# Altium PCB QuadCape_4L_PCB.PcbDoc
Units mil, origin at the board's own origin, x right, y up, seen from the top; angles counter-clockwise.
Board outline 3645 x 4300 mil, 4 copper layers (Top Layer, PowerPlane, GroundPlane, Bottom Layer), stack 35.5 mil thick; 56 components, 85 nets, 303 pads, 40 vias.
Unrouted connection lines stored in the file: 28.
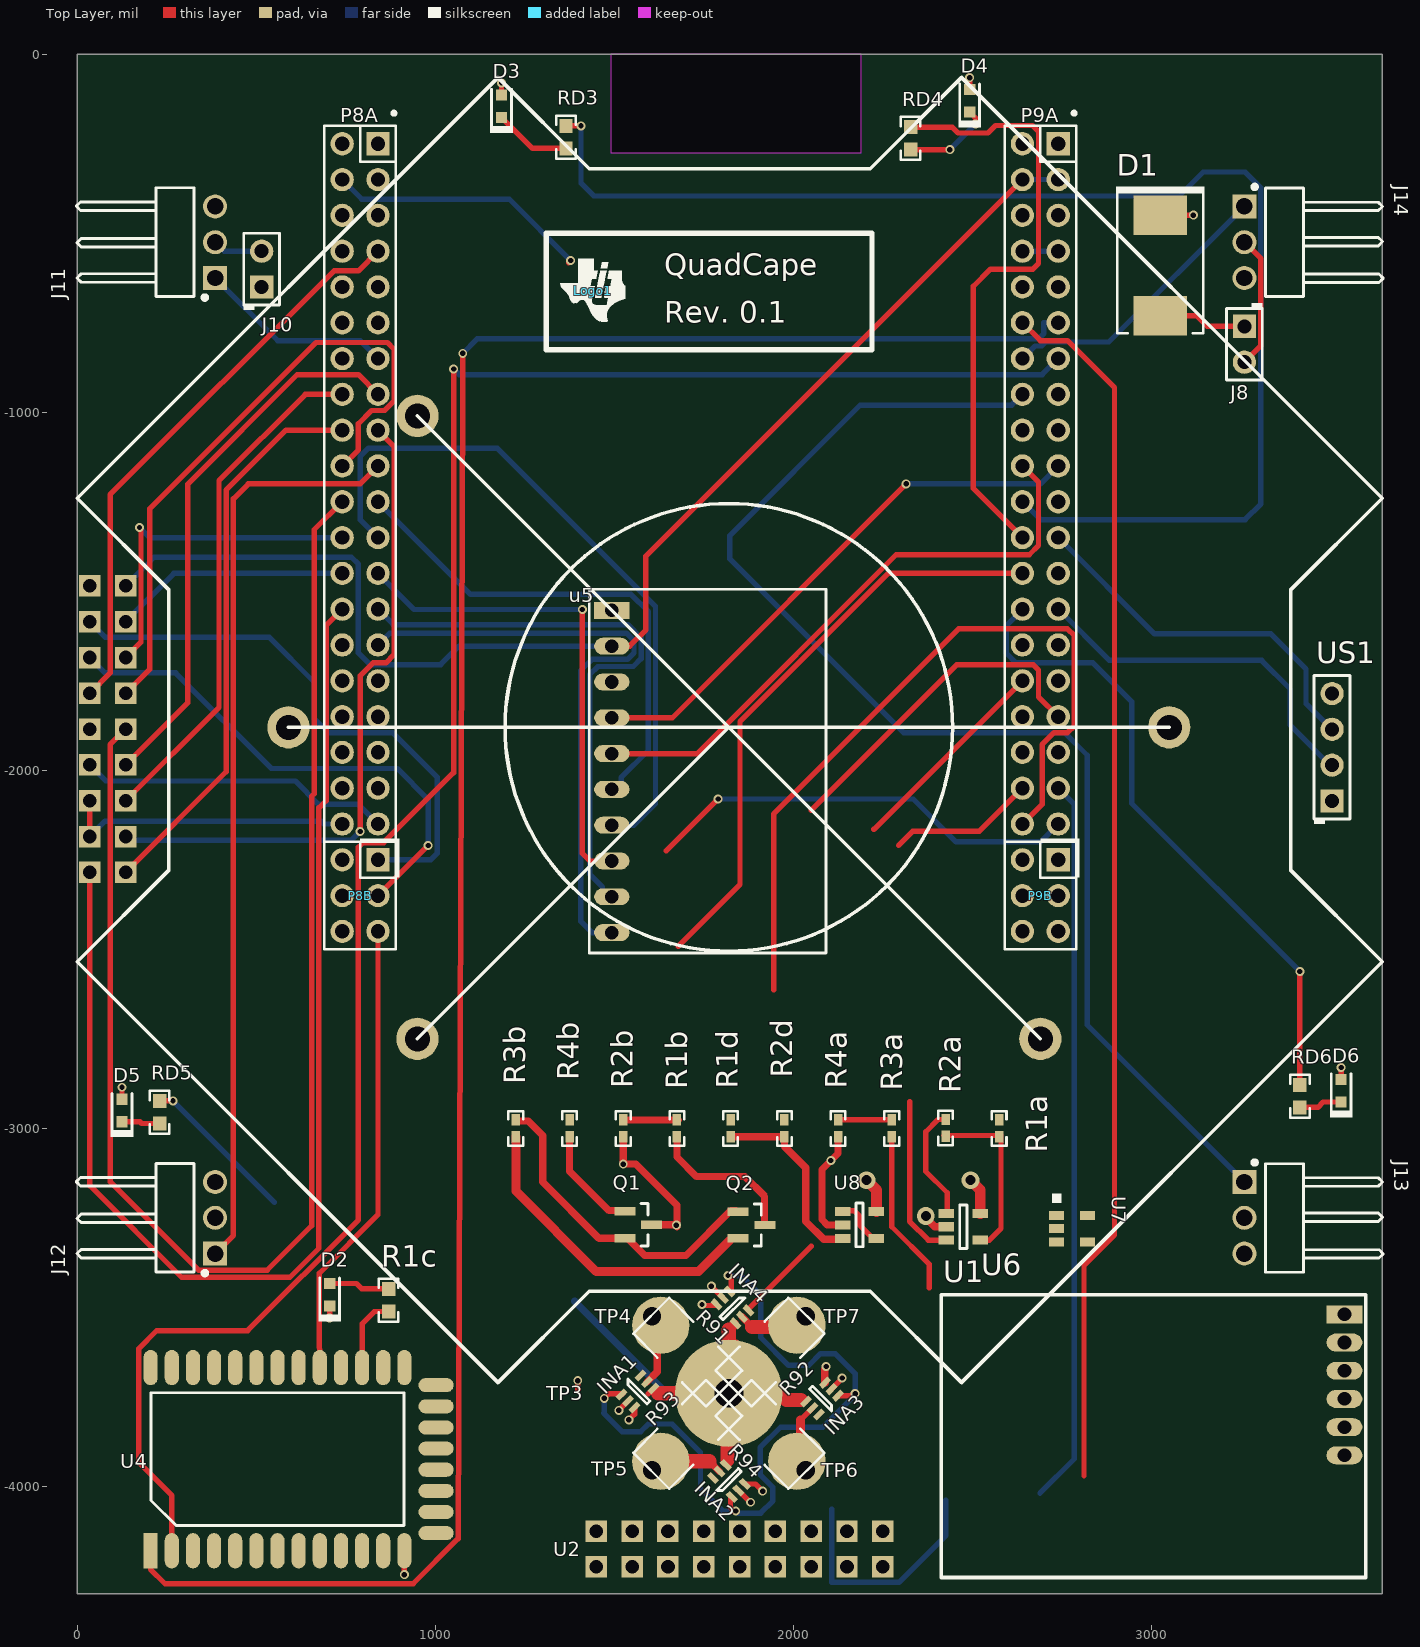
[diagram p0: Top Layer view]
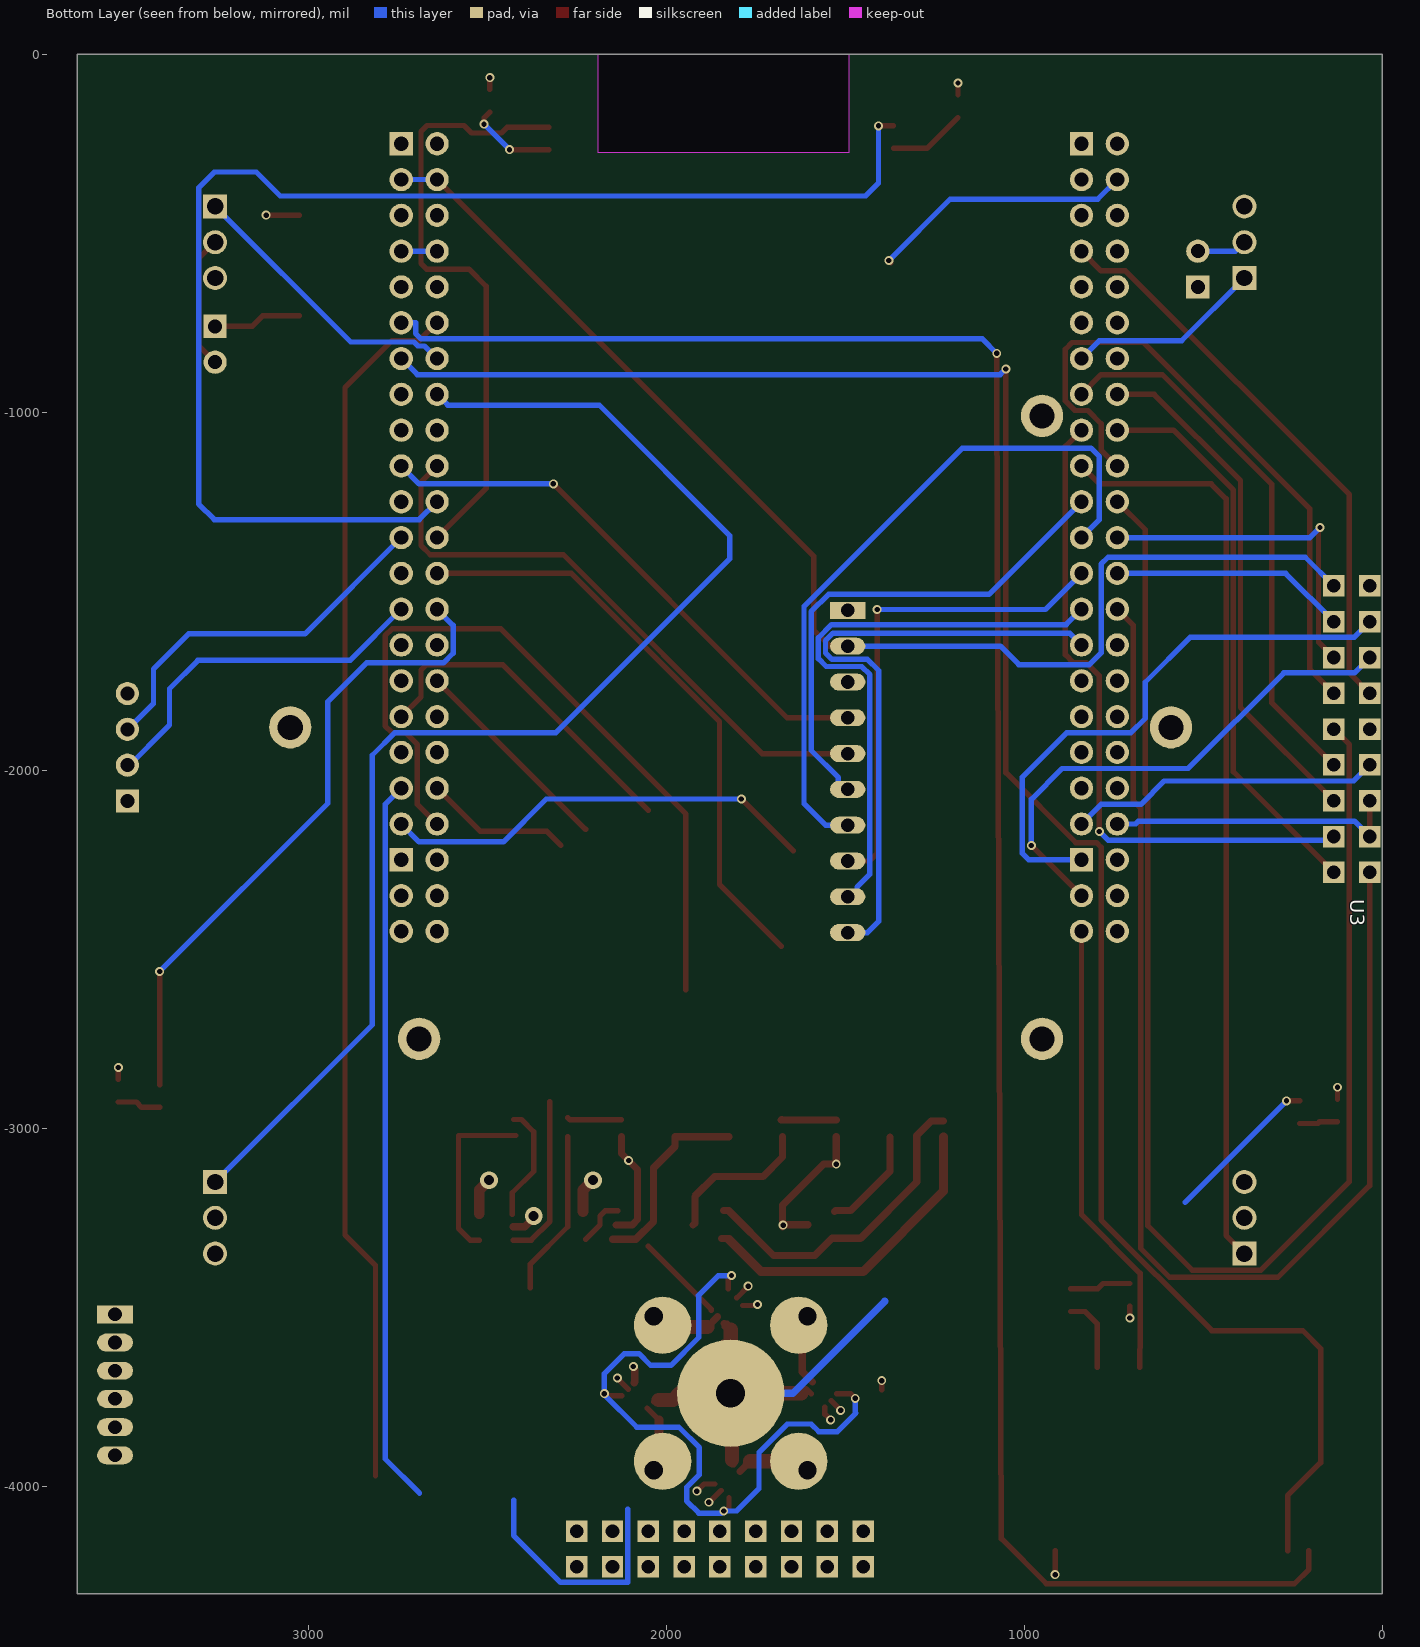
[diagram p1: Bottom Layer view, seen from below]
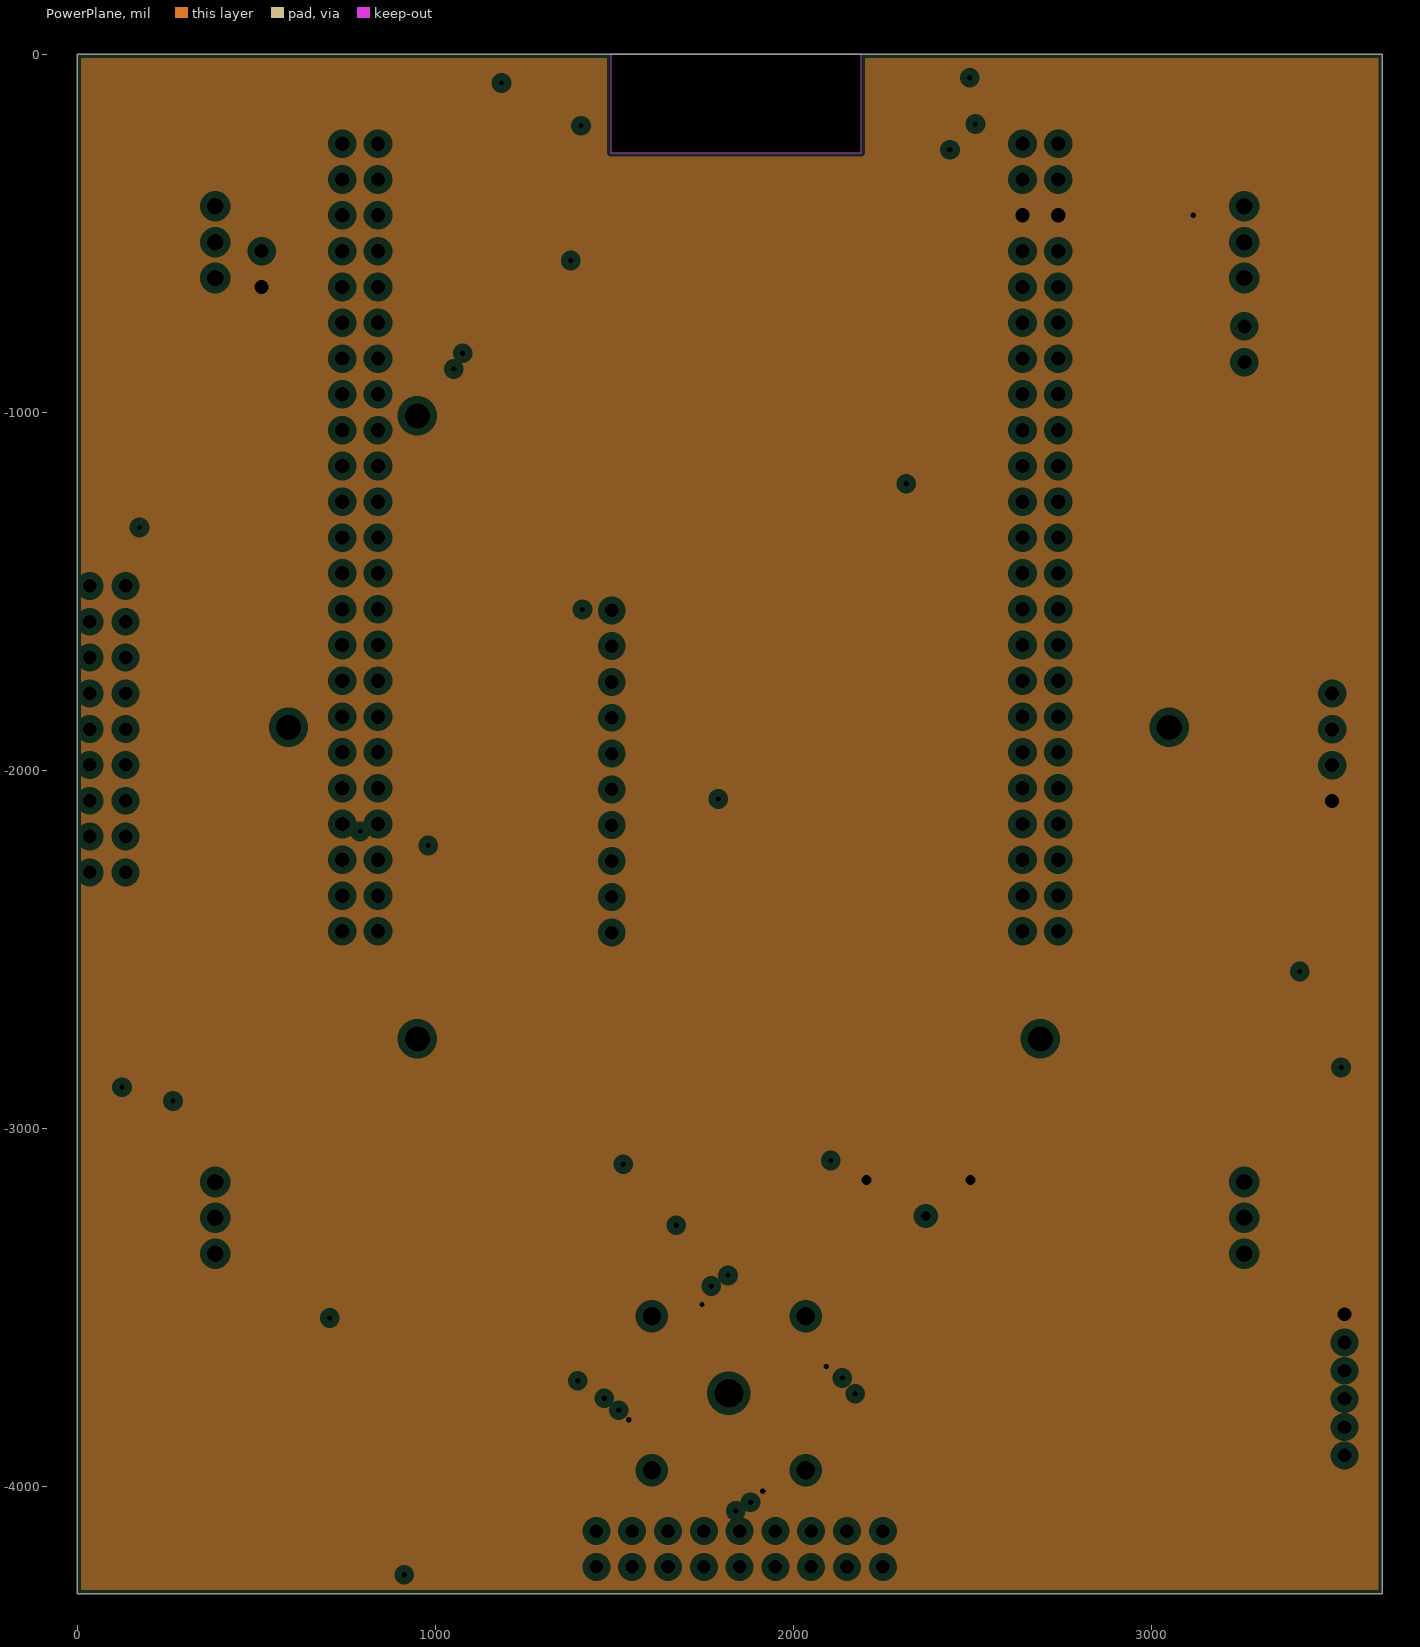
[diagram p2: PowerPlane, clearances drawn from the general rule]
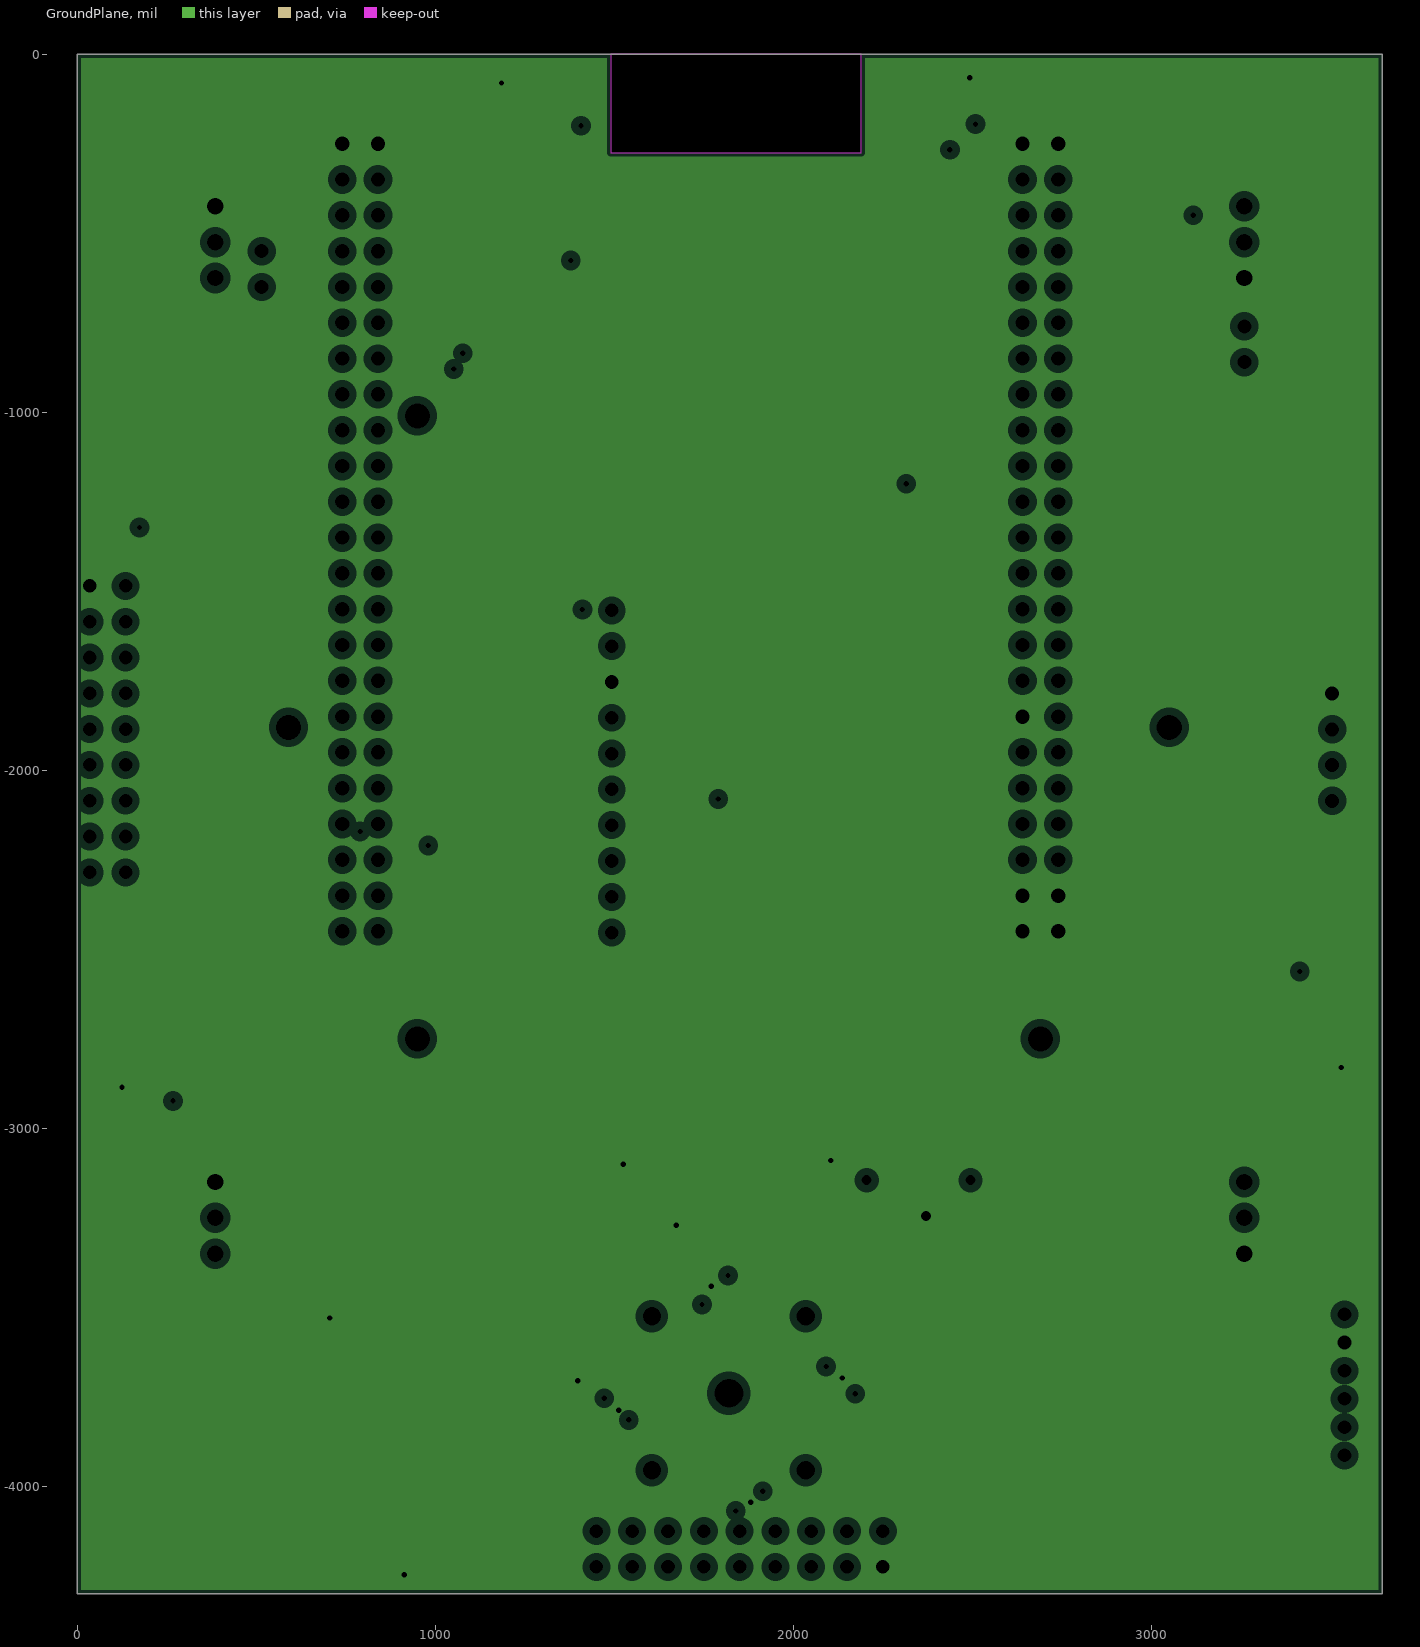
[diagram p3: GroundPlane, clearances drawn from the general rule]

## Layer stack, top to bottom
Top Layer: signal copper 1.4
Dielectric: core 10, FR-4, Dk 4.8
PowerPlane: plane copper 1.35, net VDD_5V
Dielectric: prepreg 10, FR-4, Dk 4.8
GroundPlane: plane copper 1.35, net GND
Dielectric: core 10, FR-4, Dk 4.8
Bottom Layer: signal copper 1.4

## Board outline
0,-4300 0,0 3645,0 3645,-4300
cut-out: 1490,0 1490,-275 2190,-275 2190,0

## Design rules (kind name [scope] priority, off if disabled: settings)
AssemblyTestPointUsage [All] p1 off:
AssemblyTestpoint [All] p1 off: testpointundercomponent=TRUE minsize=40 maxsize=100 preferedsize=60 minholesize=0 maxholesize=40 preferedholesize=32 testpointgrid=1 usegrid=TRUE gridtolerance=0.01 allowsidetop=TRUE allowsidebottom=TRUE
Clearance [All] p1: gap=5
ComponentClearance [All] p1 off: gap=10 collisioncheckmode=3 verticalgap=10 showdistances=FALSE
DiffPairsRouting [All] p1 off: maxlimit=10 minlimit=10 mostfreqgap=10 maxuncoupledlength=500
FabricationTestPointUsage TestPointUsage [All] p1 off: valid=0 allowmultiple=FALSE
FabricationTestpoint Testpoint [All] p1 off: side=3 testpointundercomponent=TRUE minsize=40 maxsize=100 preferedsize=60 minholesize=0 maxholesize=40 preferedholesize=32 testpointgrid=1 allowsidetop=TRUE allowsidebottom=TRUE usegrid=TRUE gridtolerance=0.01
FanoutControl Fanout_BGA [IsBGA] p1 off: bgadir=Out bgaviamode=Centered fanoutstyle=Auto fanoutdirection=Alternating viagrid=1 // Fanout_BGA (Default Rule)
FanoutControl Fanout_LCC [IsLCC] p2 off: bgadir=Out bgaviamode=Centered fanoutstyle=Auto fanoutdirection=Alternating viagrid=1 // Fanout_LCC (Default Rule)
FanoutControl Fanout_SOIC [IsSOIC] p3 off: bgadir=Out bgaviamode=Centered fanoutstyle=Auto fanoutdirection=Alternating viagrid=1 // Fanout_SOIC (Default Rule)
FanoutControl Fanout_Small [(CompPinCount < 5)] p4 off: bgadir=Out bgaviamode=Centered fanoutstyle=Auto fanoutdirection=OutThenIn viagrid=1 // Fanout_Small (Default Rule)
FanoutControl Fanout_Default [All] p5 off: bgadir=Out bgaviamode=Centered fanoutstyle=Auto fanoutdirection=Alternating viagrid=1 // Fanout_Default (Default Rule)
Height [All] p1 off: minheight=0 maxheight=1000 prefheight=500
HoleSize [All] p1: absolutevalues=TRUE maxlimit=400 minlimit=15 maxpercent=80.000 minpercent=20.000
HoleToHoleClearance [All] p1: gap=8 allowstackedmicrovias=TRUE
LayerPairs [All] p1 off: enforce=FALSE
MinimumSolderMaskSliver [All] p1: minsoldermaskwidth=4
PlaneClearance [All] p1: clearance=20
PlaneConnect [All] p1: planeconnectstyle=Relief reliefexpansion=20 reliefentries=4 reliefconductorwidth=10 reliefairgap=10
PolygonConnect [All] p1: connectstyle=Relief reliefconductorwidth=25 reliefentries=4 polygonreliefangle="90 Angle" airgapwidth=10
RoutingVias [All] p1: holewidth=15 width=25 viastyle="Through Hole" minholewidth=15 minwidth=25 maxholewidth=400 maxwidth=500
SilkToSilkClearance [All] p1: silktosilkclearance=5
SilkscreenOverComponentPads [All] p1: minsilkscreentomaskgap=5
SolderMaskExpansion [All] p1: expansion=2
Width [All] p1: maxlimit=100 minlimit=10 preferedwidth=15 minimp=50.000000 maximp=50.000000 favimp=50.000000
8 further rules are at their usual default settings.

## Classes and differential pairs
component class Header: J1 J2 J3 J4 J5 J6 P1 P2 P3 P4 US1

## Components (designator, comment, footprint, x,y, rotation, side; value= is the part's Value field where it differs from the comment)
D1 "CDBC520-G" SMC 3025,-590 r270 top
D2 "150060YS75000" WL-SMCW_YELLOW 705,-3465 r90 top
D3 "150060YS75000" WL-SMCW_YELLOW 1185,-145 r90 top
D4 "150060YS75000" WL-SMCW_YELLOW 2492.72,-130 r90 top
D5 "150060YS75000" WL-SMCW_YELLOW 125,-2950 r90 top
D6 "150060YS75000" WL-SMCW_YELLOW 3530,-2895 r90 top
INA1 "INA213AIDCK" DCK0006A_N 1565,-3735 r45 top
INA2 "INA213AIDCK" DCK0006A_N 1820,-3985 r135 top
INA3 "INA213AIDCK" DCK0006A_N 2080,-3755 r225 top
INA4 "INA213AIDCK" DCK0006A_N 1830,-3500 r315 top
J8 "5-146278-2" TE_5-146278-2 3260,-810 r270 top
J10 "5-146278-2" TE_5-146278-2 515,-600 r90 top
J11 "PEC03SBAN" Sullins_PEC03SBAN 385,-525 r90 top
J12 "PEC03SBAN" Sullins_PEC03SBAN 385,-3250 r90 top
J13 "PEC03SBAN" Sullins_PEC03SBAN 3260,-3250 r270 top
J14 "PEC03SBAN" Sullins_PEC03SBAN 3260,-525 r270 top
Logo1 "Texas Instruments" TI_Symbol_Overlay_Small 1440,-660 r0 top
P8A "Comment" TSW-120-07-G-D 790,-1200 r270 top locked
P8B "Comment" SULLINS_PEC03DAAN 790,-2350 r270 top locked
P9A "Comment" TSW-120-07-G-D 2690,-1200 r270 top locked
P9B "Comment" SULLINS_PEC03DAAN 2690,-2350 r270 top locked
Q1 "BC817-16LT1G" SOT-23 1566.93,-3269.48 r0 top
Q2 "BC817-16LT1G" SOT-23 1883.17,-3270 r0 top
R1a "CRCW040226K1FKED" 0402 2575,-3000 r270 top
R1b "CRCW040243K2FKED" 0402 1675,-3000 r270 top
R1c "RT0603DRE07459RL" 0603 870,-3480 r90 top
R1d "CRCW040210K0JNED" 0402 1825,-3000 r270 top
R2a "CRCW040212K4FKED" 0402 2425.46,-2998.86 r90 top
R2b "CRCW040224K3FKED" 0402 1525,-3000 r90 top
R2d "CRCW040210K0JNED" 0402 1975,-3000 r270 top
R3a "CRCW040251K0JNED" 0402 2275,-3000 r90 top
R3b "CRCW040243K2FKED" 0402 1225,-3000 r270 top
R4a "CRCW0402100KFKED" 0402 2125,-3000 r90 top
R4b "CRCW040243K2FKED" 0402 1375,-3000 r270 top
R91 "CSNL2010FT1L00" 2010M 1705,-3625 r135 top
R92 "CSNL2010FT1L00" 2010M 1935,-3625 r225 top
R93 "CSNL2010FT1L00" 2010M 1705,-3855 r225 top
R94 "CSNL2010FT1L00" 2010M 1935,-3855 r135 top
RD3 "RT0603DRE07459RL" 0603 1365,-231.5 r90 top
RD4 "RT0603DRE07459RL" 0603 2327.72,-235 r90 top
RD5 "RT0603DRE07459RL" 0603 230,-2955 r90 top
RD6 "RT0603DRE07459RL" 0603 3415,-2910 r90 top
TP3 "TESTPOINT" TESTPOINT#1 1820,-3740 r0 top
TP4 "TESTPOINT" TESTPOINT#2 1605,-3525 r0 top
TP5 "TESTPOINT" TESTPOINT#3 1605,-3955 r0 top
TP6 "TESTPOINT" TESTPOINT#4 2035,-3955 r0 top
TP7 "TESTPOINT" TESTPOINT#5 2035,-3525 r0 top
U1 "SKM53" SKM53 3598.55,-3464.53 r180 top
U2 "OV7670" HEADER_2X9 2250,-4125 r180 top
U3 "OV7670" HEADER_2X9 135,-1485 r270 bottom
U4 "HC-06" HC-06 205,-4180 r90 top
u5 "IMU_10DOF" IMU_10DOF 1430,-2510 r0 top (schematic designator U5)
U6 "OPA735AIDBVR" DBV0005A_N 2475,-3275 r0 top
U7 "SN74LVC1G04DBV" SOT23-5P 2780,-3280 r0 top
U8 "OPA735AIDBVR" DBV0005A_N 2185,-3270 r0 top
US1 "5-146278-4" TE_5-146278-4 3504.81,-1935.57 r90 top

## Footprints (in the part's own frame and the unit in brackets; to place one, negate y for a bottom-side part, rotate by r counter-clockwise, add the part's x,y. Pads: shape width x height; smd on the part's side, far side on the other; paste and mask are expansions set on the pad)
0402 [mm] "0402 from SM-752 data"
  rect 0.8x0.6 smd: 1(-0.6,0) 2(0.6,0)
  silkscreen extent -1.22,-0.52 1.22,0.52, body extent -0.55,-0.3 0.55,0.3, height 0.6
0603 [mm] "0603 from SM-752 data"
  rect 1x0.95 smd: 1(-0.8,0) 2(0.8,0)
  silkscreen extent -1.52,-0.69 1.52,0.69, body extent -0.87,-0.47 0.87,0.47, height 0.85
2010M [mm]
  rect 1.6x2.7 smd: 1(-2.4,0) 2(2.4,0)
  silkscreen extent -3.65,-1.8 3.65,1.8, body extent -2.73,-1.45 2.73,1.45, height 1.66
DBV0005A_N [mm] "SOT23, 5-Leads, Body 2.9x1.6mm, Pitch 0.95mm, Lead Span 2.8mm, IPC Medium Density"
  rect 1.1x0.65 smd: 1(-1.2,0.95) 2(-1.2,0) 3(-1.2,-0.95) 4(1.2,-0.95) 5(1.2,0.95)
  silkscreen extent -0.25,-1.55 0.25,1.55, body extent -1.42,-1.46 1.42,1.46, height 1.08
DCK0006A_N [mm] "SOT23, 6-Leads, Body 2x1.3mm, Pitch 0.65mm, Lead Span 2.1mm, IPC Medium Density"
  rect 0.85x0.4 smd: 1(-0.95,0.65) 2(-0.95,0) 3(-0.95,-0.65) 4(0.95,-0.65) 5(0.95,0) 6(0.95,0.65)
  silkscreen extent -0.15,-1.1 0.15,1.1, body extent -1.14,-1 1.14,1, height 0.94
HC-06 [mm]
  rect 2.5x1 smd: 1(0,0)
  oval 2.5x1 smd: 2(0,-1.5) 3(0,-3) 4(0,-4.5) 5(0,-6) 6(0,-7.5) 7(0,-9) 8(0,-10.5) 9(0,-12) 10(0,-13.5) 11(0,-15) 12(0,-16.5) 13(0,-18) 22(13,-18) 23(13,-16.5) 24(13,-15) 25(13,-13.5) 26(13,-12) 27(13,-10.5) 28(13,-9) 29(13,-7.5) 30(13,-6) 31(13,-4.5) 32(13,-3) 33(13,-1.5) 34(13,0)
  oval 1x2.5 smd: 14(1.25,-20.25) 15(2.75,-20.25) 16(4.25,-20.25) 17(5.75,-20.25) 18(7.25,-20.25) 19(8.75,-20.25) 20(10.25,-20.25) 21(11.75,-20.25)
  silkscreen extent 1.79,-17.97 11.22,-0.04
HEADER_2X9 [mil]
  rect 60x60 hole 38: 1(0,0) 2(0,100) 3(100,0) 4(100,100) 5(200,0) 6(200,100) 7(300,0) 8(300,100) 9(400,0) 10(400,100) 11(500,0) 12(500,100) 13(600,0) 14(600,100) 15(700,0) 16(700,100) 17(800,0) 18(800,100)
IMU_10DOF [mm]
  rect 2.5x1.2 hole 0.966: 1(1.6,24.3)
  oval 2.5x1.2 hole 0.966: 2(1.6,21.76) 3(1.6,19.22) 4(1.6,16.68) 5(1.6,14.14) 6(1.6,11.6) 7(1.6,9.06) 8(1.6,6.52) 9(1.6,3.98) 10(1.6,1.44)
  silkscreen extent 0,0 16.8,25.8
SKM53 [mm] "GPS Module"
  rect 2.54x1.27 hole 0.966: 1(1.5,1.4)
  oval 2.54x1.27 hole 0.966: 2(1.5,3.4) 3(1.5,5.4) 4(1.5,7.4) 5(1.5,9.4) 6(1.5,11.4)
  silkscreen extent 0,0 30.1,20.07
SMC [mil] "Molded Diode, 2-Leads, Body 6.9x5.8mm, IPC Medium Density, based on OnSemi component dimensions and land patterns"
  rect 110x150 smd: 1(-140.49,0) 2(140.49,0)
  silkscreen extent -221,-124 189,123, body extent -156,-116 156,116, height 91
SOT23-5P [mil]
  rect 42x25 smd: 1(-45,37) 2(-45,0) 3(-45,-37) 4(42,-37) 5(42,37)
  silkscreen extent -57,73 -32,98
SOT-23 [mm] "SOT23, 3-Leads, Body 2.9x1.3mm, Pitch 0.95mm, Lead Span 2.5mm, IPC Medium Density"
  rect 1.5x0.6 smd: 1(-0.95,0.95) 2(-0.95,-0.95) 3(0.95,0)
  silkscreen extent 0.2,-1.5 0.7,1.5, body extent -1.16,-1.45 1.21,1.45, height 1
SULLINS_PEC03DAAN [mm] "SULLINS"
  rect 1.65x1.65 hole 1.016 mask+0: 1(-2.54,1.27)
  round 1.65 hole 1.016 mask+0: 2(-2.54,-1.27) 3(0,1.27) 4(0,-1.27) 5(2.54,1.27) 6(2.54,-1.27)
  silkscreen extent -4.06,-2.54 3.81,2.79, body extent -3.81,-2.54 3.81,2.54, height 8.38
Sullins_PEC03SBAN [mm] "Sullins"
  rect 1.7x1.7 hole 1.16: 1(-2.54,0)
  round 1.7 hole 1.16: 2(0,0) 3(2.54,0)
  silkscreen extent -4.07,0.58 3.86,9.85, body extent -3.81,-0.29 3.81,9.94, height 3.56
TE_5-146278-2 [mm] "TE CONNECTIVITY"
  rect 1.65x1.65 hole 1: 1(-1.27,0)
  round 1.65 hole 1: 2(1.27,0)
  silkscreen extent -2.92,-1.27 2.54,1.27, body extent -2.41,-1.17 2.41,1.17, height 8.13
TE_5-146278-4 [mm] "TE CONNECTIVITY"
  rect 1.65x1.65 hole 1: 1(-3.81,0)
  round 1.65 hole 1: 2(-1.27,0) 3(1.27,0) 4(3.81,0)
  silkscreen extent -5.46,-1.27 5.08,1.27, body extent -4.95,-1.17 4.95,1.17, height 8.13
TESTPOINT#1 [mil]
  round 300 hole 80.8: 1(0,0)
TESTPOINT#2 [mil]
  round 160 hole 50.8 copper offset 25,-25: 1(0,0)
TESTPOINT#3 [mil]
  round 160 hole 50.8 copper offset 25,25: 1(0,0)
TESTPOINT#4 [mil]
  round 160 hole 50.8 copper offset -25,25: 1(0,0)
TESTPOINT#5 [mil]
  round 160 hole 50.8 copper offset -25,-25: 1(0,0)
TI_Symbol_Overlay_Small [mil]
  silkscreen extent -90,-88 91,88
TSW-120-07-G-D [mm] "Samtec 100mil, 2x20, 230 mil above insulator"
  rect 1.65x1.65 hole 1.016 mask+0: 1(-24.13,1.27)
  round 1.65 hole 1.016 mask+0: 2(-24.13,-1.27) 3(-21.59,1.27) 4(-21.59,-1.27) 5(-19.05,1.27) 6(-19.05,-1.27) 7(-16.51,1.27) 8(-16.51,-1.27) 9(-13.97,1.27) 10(-13.97,-1.27) 11(-11.43,1.27) 12(-11.43,-1.27) 13(-8.89,1.27) 14(-8.89,-1.27) 15(-6.35,1.27) 16(-6.35,-1.27) 17(-3.81,1.27) 18(-3.81,-1.27) 19(-1.27,1.27) 20(-1.27,-1.27) 21(1.27,1.27) 22(1.27,-1.27) 23(3.81,1.27) 24(3.81,-1.27) 25(6.35,1.27) 26(6.35,-1.27) 27(8.89,1.27) 28(8.89,-1.27) 29(11.43,1.27) 30(11.43,-1.27) 31(13.97,1.27) 32(13.97,-1.27) 33(16.51,1.27) 34(16.51,-1.27) 35(19.05,1.27) 36(19.05,-1.27) 37(21.59,1.27) 38(21.59,-1.27) 39(24.13,1.27) 40(24.13,-1.27)
  silkscreen extent -26.42,-2.54 25.4,2.54, body extent -25.4,0 25.4,5.08, height 8.38
WL-SMCW_YELLOW [mm] "WURTH"
  rect 0.8x0.8 smd: 1(-0.8,0) 2(0.8,0)
  silkscreen extent -1.9,-0.8 1.2,0.8, body extent -0.85,-0.45 0.85,0.45, height 0.8

## Part data
D1: "Diode, Schottky, 20V, 5A, SMC"
D2 D3 D4 D5 D6: "LED, Yellow, SMD"
INA1 INA2 INA3 INA4: "Voltage Output, High or Low Side Measurement, Bi-Directional Zero-Drift Series Current-Shunt Monitor, DCK0006A"
J8 J10: "Header, 100mil, 2x1, Tin, TH"
J11 J12 J13 J14: "Header, 100mil, 3x1, Tin, R/A, TH"
Logo1: library part TI_Logo, "Texas Instrument Corporate Signature"
P8A P9A: library part TSW-120-07-G-D, "Header, 100mil, 20x2, Gold, TH"
P8B P9B: library part PEC03DAAN, "Header, 100mil, 3x2, Tin, TH"
Q1 Q2: library part "BC817-16LT1G, ON Semiconductor", "Transistor, NPN, 45V, 0.5A, SOT-23"
R1a: "RES, 26.1k ohm, 1%, 0.063W, 0402"
R1b R3b R4b: "RES, 43.2k ohm, 1%, 0.063W, 0402"
R1c RD3 RD4 RD5 RD6: "RES, 459 ohm, 0.5%, 0.1W, 0603"
R1d R2d: "RES, 10k ohm, 5%, 0.063W, 0402"
R2a: "RES, 12.4k ohm, 1%, 0.063W, 0402"
R2b: "RES, 24.3k ohm, 1%, 0.063W, 0402"
R3a: "RES, 51k ohm, 5%, 0.063W, 0402"
R4a: "RES, 100k ohm, 1%, 0.063W, 0402"
R91 R92 R93 R94: "RES, 0.001 ohm, 1%, 1.5W, 2010"
TP3 TP4 TP5 TP6 TP7: "TEST POINT.  No entry in BOM."
U2 U3: library part HEADER_2X9, "Header, Male 2x9 pin, 100mil spacing"
u5: "Header, Male 2x9 pin, 100mil spacing"
U6 U8: "0.05 uV/degC (Max), Single-Supply CMOS Zero-Drift Series Operational Amplifier, 2.7 to 12 V, -40 to 85 degC, 5-pin SOT23 (DBV0005A), Green (RoHS & no Sb/Br)"
U7: "IC, Single Inverter"
US1: "Header, 100mil, 4x1, Tin, TH"

## Free pads (board coordinates)
  round 118 hole 70: 0(590,-1880) 0(950,-2750) 0(950,-1010) 0(2690,-2750) 0(3050,-1880)

## Via types
v1: diameter 25, hole 15, Top Layer to Bottom Layer, 36 vias
v2: diameter 50, hole 28, Top Layer to Bottom Layer, 3 vias
v3: diameter 25, hole 15, Top Layer to Bottom Layer, tented bottom, 1 vias

## Nets (pads, with @x,y where several pads share a name; then routed paths per layer and width w, separated by ;. In a path a pad name is that pad's centre, name@x,y a point inside that pad or via, vN(x,y) a via of type N, cw(c..) or ccw(c..) an arc to the next point about the centre after c; other vN are vias at no path point)
AIN0: P9A.39 R1b.1 R2b.2 | length 1381
  Top Layer w15: 1645,-2225 v1(1790,-2080)
  Top Layer w20: R2b.2 1678.62,-2976.38 R1b.1@1677.25,-2975
  Bottom Layer w15: v1(1790,-2080) 2335,-2080 2455,-2200 2690,-2200 P9A.39
AIN1: INA1.6 P9A.40 | length 2161.3
  Top Layer w15: 1945,-2613 1945,-2122 2462,-1605 2766,-1605 2784.98,-1623.98 2784.98,-1876.02 2766,-1895 2728,-1895 2695,-1928 2695,-2095 P9A.40
AIN2: INA2.6 P9A.37 | length 2702.7
  Bottom Layer w15: 2107,-4064 2107,-4268 2295,-4268 2426,-4137 2426,-4039 ; 2689,-4019 2785,-3923 2785,-2095 P9A.37
AIN3: INA3.6 P9A.38 | length 412.3
  Top Layer w15: 2294,-2210 2334,-2170 2520,-2170 P9A.38
AIN4: INA4.6 P9A.33 | length 1214.1
  Top Layer w15: INA4.6 1874.54,-3505 2050,-3329.54 ; 2050,-2112 2457,-1705 2670,-1705 2685,-1720 2685,-1795 P9A.33
BATT(+): INA1.4 INA2.4 INA3.4 INA4.4 Q2.2 R3b.2 R91.1 R92.2 R93.1 R94.2 TP3.1 | length 2881.8
  Top Layer w15: 1595.19,-3741 INA1.4 1622.89,-3726.65 1622.89,-3740 ; INA2.4 1816.11,-3940.46 1816.11,-3925.42 ; TP3.1 1820,-3676.5 1852.87,-3676.5 R92.2 1868.19,-3624 1841.37,-3597.19 1833.81,-3597.19 1771.81,-3659.19 R91.1 1771.81,-3740 1771.81,-3752 1764.27,-3753.65 1726,-3762 1726,-3788.19 R93.1 1771.81,-3820 1802.7,-3850.88 TP3.1@1831.83,-3850.88 ; INA4.4@1829,-3544.54 1829,-3555 1838.35,-3555 INA4.4 ; TP3.1@1831.83,-3865.28 TP3.1@1831.83,-3850.88 ; TP3.1@1962.11,-3740 1913.92,-3788.19 R94.2 1857.3,-3850.88 TP3.1@1831.83,-3850.88 ; 2020.42,-3758.89 2020.42,-3763.35 INA3.4
  Top Layer w20: 1820,-3562.89 INA4.4@1838.06,-3544.83 ; Q2.2@1823.01,-3307.4 Q2.2
  Top Layer w25: R3b.2 1225,-3175 1450,-3400 1735,-3400 Q2.2@1825,-3310
  Top Layer w40: 1622.89,-3740 1771.81,-3740 TP3.1 ; 1816.11,-3925.42 1816.11,-3881 TP3.1@1831.83,-3865.28 ; TP3.1@1820,-3676.5 1820,-3562.89 ; TP3.1@1962.11,-3740 1981,-3758.89 2020.42,-3758.89
  Bottom Layer w20: 1389.64,-3482.19 1388.64,-3483.19 1645.45,-3740 TP3.1
DC_3.3V: P9A.3 P9A.4 U2.1 U3.1 U4.12 u5.2 | length 3589.6
  Top Layer w15: u5.2 1542.69,-1653.31 1588,-1608 1588,-1402 P9A.4
  Bottom Layer w15: U3.1 215,-1405 766,-1405 785,-1424 785,-1672 818,-1705 1015,-1705 1066.69,-1653.31 u5.2 ; P9A.4 P9A.3
EHRPWM1A: J14.1 P9A.14 | length 796
  Bottom Layer w15: P9A.14 2675.02,-814.98 2693.83,-814.98 2704.98,-803.83 2881.17,-803.83 J14.1
EHRPWM1B: J13.1 P9A.16 | length 3645.9
  Bottom Layer w15: P9A.16 2610,-980 2187,-980 1822,-1345 1822,-1409 2308,-1895 2758,-1895 2821,-1958 2821,-2711 J13.1
EHRPWM2A: J12.1 P8A.19 | length 2571.2
  Top Layer w15: J12.1 436,-3299 436,-1242 478,-1200 790,-1200 P8A.19
EHRPWM2B: J11.1 P8A.13 | length 548.2
  Bottom Layer w15: J11.1 560,-800 790,-800 P8A.13
ESC_1: INA1.5 R91.2 TP4.1 | length 248.5
  Top Layer w15: TP4.1 1620,-3540 R91.2
  Top Layer w20: INA1.5 1620,-3680 1620,-3540 TP4.1
ESC_2: INA2.5 R93.2 TP5.1 | length 258.1
  Top Layer w15: TP5.1 1638.19,-3955 R93.2 1630,-3921.81 TP5.1@1630,-3930
  Top Layer w20: 1765,-3930 INA2.5
  Top Layer w40: TP5.1@1630,-3930 1765,-3930
ESC_3: INA3.5 R94.1 TP6.1 | length 242.3
  Top Layer w15: R94.1 2001,-3921.81 2034.19,-3955 TP6.1 ; 2019.91,-3815.09 INA3.5
  Top Layer w25: 2019.91,-3815.09 2019.91,-3939.91 TP6.1
ESC_4: INA4.5 R92.1 TP7.1 | length 221.1
  Top Layer w15: R92.1 2001.81,-3542.37 2019.19,-3525 TP7.1
  Top Layer w20: INA4.5 1885,-3555
  Top Layer w40: 1885,-3555 2005,-3555 R92.1
GND: D2.1 D3.2 D4.2 D5.2 D6.2 INA1.2 INA2.2 INA3.2 INA4.2 J11.3 J12.3 J13.3 J14.3 P8A.1 P8A.2 P9A.1 P9A.2 P9A.34 P9B.3 P9B.4 P9B.5 P9B.6 Q1.3 R1a.1 R2b.1 R2d.1 R4a.1 U1.2 U2.2 U3.2 U4.13 u5.3 U6.2 U7.3 U8.2 US1.4 | length 1208.3
  Top Layer w15: D5.2 v1(125,-2885.26) ; v1(705,-3529.74) D2.1 ; v1(913.66,-4246.71) U4.13 ; D3.2 v1(1185,-80.26) ; 1398,-3730 v1(1398,-3705) ; v1@1513.03,-3786.97 INA1.2 ; v1@1771.78,-3442.37 1802.96,-3473.55 INA4.2 ; INA2.2 1880.1,-4045.1 v3@1884.54,-4045.1 ; INA3.2 v1@2129.32,-3705.68 ; D4.2 v1(2492.72,-65.26) ; D6.2 v1(3530,-2830.26)
  Top Layer w20: R2b.1 v1(1525,-3100) 1560,-3100 1675,-3215 v1@1675,-3275 ; Q1.3 v1@1671.15,-3269.48 ; R4a.1 2125,-3070 2080,-3115 2080,-3255 2095,-3270 U8.2 U8.2@2140,-3270 ; v2@2370,-3250 2395,-3275 U6.2
  other v1: 1512.81,-3787.66 2136.35,-3697.46 1770.99,-3440.67 1673.42,-3270.61 2105,-3090
  other v2: 2370,-3245
  other v3: 1880.66,-4044.46
GPIO0_26: P8A.14 U2.4
GPIO0_27: P8A.17 U3.15 | length 1875
  Top Layer w15: v1(790,-2171) 790,-1736 826,-1700 862,-1700 885,-1677 885,-1095 P8A.17
  Bottom Layer w15: U3.15 135,-2195 766,-2195 v1(790,-2171)
GPIO1_0: P8A.25 u5.8 | length 1384.7
  Top Layer w15: v1(1411,-1551) 1411,-2232 1432.31,-2253.31 u5.8
  Bottom Layer w15: P8A.25 941,-1551 v1(1411,-1551)
GPIO1_1: P8A.24 U3.5 | length 960.1
  Top Layer w15: U3.5 178,-1642 178,-1326 v1(174,-1322)
  Bottom Layer w15: v1(174,-1322) 202,-1350 P8A.24
GPIO1_2: P8A.5
GPIO1_3: P8A.6 U2.9
GPIO1_4: P8A.23 u5.7 | length 1962.9
  Bottom Layer w15: P8A.23 790,-1300 790,-1124 814,-1100 1173,-1100 1615,-1542 1615,-2093.31 1555,-2153.31 u5.7
GPIO1_5: P8A.22 U3.9 | length 4055.5
  Top Layer w15: U3.9 92,-1928 92,-3149 339,-3396 530.75,-3396 655.02,-3271.73 655.02,-2072 662,-2065.02 662,-1328 P8A.22
GPIO1_6: P8A.3 U2.6
GPIO1_7: P8A.4 U2.7 | length 740.1
  Top Layer w15: v1@1372,-582 v1(1378,-576)
  Bottom Layer w15: P8A.4 795,-405 1207,-405 v1(1378,-576)
GPIO1_12: P8A.12 U2.3
GPIO1_13: P8A.11 U2.5
GPIO1_14: P8A.16 U3.13 | length 1445.9
  Top Layer w15: U3.13 396,-1824 396,-1191 637,-950 P8A.16
GPIO1_15: P8A.15 U3.11 | length 1536.9
  Top Layer w15: U3.11 309,-1811 309,-1200.5 614.5,-895 785,-895 P8A.15
GPIO1_16: P9A.15 U2.11
GPIO1_17: P9A.23 US1.3 | length 1048.9
  Bottom Layer w15: P9A.23 3009,-1619 3334,-1619 3432.13,-1717.13 3432.13,-1813.65 US1.3@3508.63,-1890.15
GPIO1_28: P9A.12 U2.10 | length 3407.2
  Top Layer w15: P9A.12 2690,-800 2766,-800 2897,-931 2897,-3297.75 2812,-3382.75 2812,-3971
GPIO1_29: P8A.26 U3.3 | length 660.9
  Bottom Layer w15: U3.3 270,-1450 P8A.26
GPIO1_30: P8A.21 u5.6 | length 1436
  Bottom Layer w15: P8A.21 1098.62,-1508.62 1546.62,-1508.62 1595,-1557 1595,-1944 1519,-2020 1519,-2053.31 u5.6
GPIO1_31: P8A.20 U3.7 | length 1833.9
  Top Layer w15: U3.7 202,-1718 202,-1269.69 666.69,-805 866,-805 885,-824 885,-968.61 858.63,-994.98 822.02,-994.98 785,-1032 785,-1105 P8A.20
GPIO2_1: P8A.18 U3.17 | length 1577.6
  Top Layer w15: U3.17 416,-2004 416,-1217 583,-1050 P8A.18
GPIO2_6: P8B.5 U4.26 | length 1286.1
  Top Layer w15: U4.26 676,-3561.56 676,-3405 840,-3241 P8B.5
GPIO2_7: R4b.1
GPIO2_8: P8B.3 U3.6 | length 1436
  Top Layer w15: P8B.3 v1(980,-2210)
  Bottom Layer w15: U3.6 78,-1728 275,-1728 542,-1995 894,-1995 980,-2081 v1(980,-2210)
GPIO2_9: U3.10
GPIO2_10: P8B.1 U3.4 | length 1594.4
  Bottom Layer w15: U3.4 78,-1628 536,-1628 662,-1754 662,-1855 702,-1895 881,-1895 1005,-2019 1005,-2232 987,-2250 P8B.1
GPIO2_12: P8A.39 U3.12 | length 873.3
  Bottom Layer w15: U3.12 80,-2030 609,-2030 674,-2095 785,-2095 P8A.39
GPIO2_13: P8A.40 U3.14 U3.16 | length 826.1
  Top Layer w15: U3.16 U3.14
  Bottom Layer w15: U3.16 78,-2142 681,-2142 689,-2150 P8A.40
GPIO2_22: P8A.27 u5.9 | length 1650.2
  Bottom Layer w15: P8A.27 883,-1593 1538.29,-1593 1575,-1629.71 1575,-1688 1553,-1710 1454,-1710 1431,-1733 1431,-2290 1467,-2326 1467,-2353.31 u5.9
GPIO2_23: P8A.29 u5.10 | length 1740.6
  Bottom Layer w15: P8A.29 873,-1617 1534,-1617 1555,-1638 1555,-1672 1537,-1690 1438,-1690 1406,-1722 1406,-2421.31 1438,-2453.31 u5.10
GPIO2_24: P8A.28 U3.18 | length 3466.5
  Top Layer w15: U3.18 35,-3160 291,-3416 594,-3416 675.02,-3334.98 675.02,-2105 695,-2085.02 695,-1595 P8A.28
GPIO2_25: P8A.30
GPIO3_18: P9B.2 U7.2
GPIO3_19: P9A.27 US1.2 | length 1011.5
  Bottom Layer w15: P9A.27 2883,-1693 3308,-1693 3387.19,-1772.19 3387.19,-1873.41 US1.2@3508.16,-1994.38
GPIO3_21: P9A.25 U2.12
I2C1_SCL: P9A.19 u5.4 | length 1538.3
  Top Layer w15: u5.4 1662,-1853.31 v1(2315.31,-1200)
  Bottom Layer w15: v1(2315.31,-1200) 2690,-1200 P9A.19
I2C1_SDA: P9A.20 u5.5 | length 1673.4
  Top Layer w15: u5.5 1732,-1953.31 2287.31,-1398 2659.02,-1398 2685,-1372.02 2685,-1195 P9A.20
LED: R1c.1 U4.24 | length 211
  Top Layer w15: U4.24 795.55,-3545.94 830,-3511.5 R1c.1
NetD1_2: D1.2 J8.1 | length 247.2
  Top Layer w15: D1.2 3127,-730.49 3156.51,-760 J8.1
NetD2_2: D2.2 R1c.2 | length 171.2
  Top Layer w15: D2.2 780,-3433.5 795,-3448.5 R1c.2
NetD3_1: D3.1 RD3.1 | length 215.8
  Top Layer w15: D3.1 1271.5,-262.99 RD3.1
NetD4_1: D4.1 RD4.1 | length 251.1
  Top Layer w15: RD4.1 v1(2437.5,-266.5) ; D4.1 2509,-177.78 v1(2509,-195)
  Bottom Layer w15: v1(2437.5,-266.5) v1(2509,-195)
NetD5_1: D5.1 RD5.1 | length 107.1
  Top Layer w15: D5.1 175,-2981.5 180,-2986.5 RD5.1
NetD6_1: D6.1 RD6.1 | length 121.2
  Top Layer w15: RD6.1 3465,-2941.5 3480,-2926.5 D6.1
NetJ8_2: J8.2 J14.2 | length 373.1
  Top Layer w15: J8.2 3306,-814 3306,-571 J14.2
NetJ10_2: J10.2 J11.2 | length 140.4
  Bottom Layer w15: J11.2 410,-550 J10.2
NetQ1_1: Q1.1 R4b.2 | length 295.9
  Top Layer w20: R4b.2@1375,-3025 1375,-3120 1485,-3230 1527.45,-3230 Q1.1
NetQ1_2: Q1.2 Q2.1 R3b.1 | length 898.3
  Top Layer w20: R3b.1@1225,-2980 1260,-2980 1300,-3020 1300,-3150 1456.88,-3306.88 Q1.2 1536.88,-3306.88 1585,-3355 1700,-3355 1825,-3230 Q2.1@1840,-3230
NetQ2_3: Q2.3 R1b.2 | length 429
  Top Layer w20: R1b.2 1675,-3080 1730,-3135 1865,-3135 1920,-3190 1920,-3265 Q2.3@1925,-3270
NetR1a_2: R1a.2 R2a.1 U6.4 | length 491.2
  Top Layer w15: R2a.1@2420,-3020 2580,-3020 2580,-3280 2547.6,-3312.4 U6.4
NetR1d_2: R1d.2 R2d.2 U8.3 | length 546.9
  Top Layer w20: R1d.2 R2d.2 1975,-3050 2035,-3110 2035,-3260 2085,-3310 U8.3@2150,-3310
NetR2a_2: R2a.2 U1.6 U6.1 | length 324.7
  Top Layer w15: R2a.2 2404.77,-2975.23 2370,-3010 2370,-3120 2430,-3180 U6.1@2430,-3240
NetR3a_1: R3a.1 U1.5 | length 464.9
  Top Layer w15: R3a.1 2275,-3275 2380,-3380 2380,-3445
NetU1_4: U1.4 U7.4
OUT_LED1: P9A.22 RD3.2 | length 3749.8
  Top Layer w15: RD3.2 v1(1407,-200)
  Bottom Layer w15: v1(1407,-200) 1407,-360 1443,-396 3078,-396 3145,-329 3262,-329 3306,-373 3306,-1256 3262,-1300 2690,-1300 P9A.22
OUT_LED2: P9A.24 RD4.2 | length 1715.1
  Top Layer w15: RD4.2 2443.5,-203.5 2460,-220 2544,-220 2565,-199 2668,-199 2685,-216 2685,-584 2669,-600 2551,-600 2503,-648 2503,-1213 P9A.24
OUT_LED3: P9A.26 RD5.2 | length 2097.2
  Top Layer w15: RD5.2 v1(267.5,-2923.5) ; 1679,-2491 1851,-2319 1851,-1864 2265,-1450 P9A.26
  Bottom Layer w15: v1(267.5,-2923.5) 551,-3207
OUT_LED4: P9A.28 RD6.2 | length 1812.7
  Top Layer w15: RD6.2 v1(3415,-2562)
  Bottom Layer w15: P9A.28 2595,-1595 2595,-1673 2622,-1700 2837,-1700 2945,-1808 2945,-2092 v1(3415,-2562)
PWR_BUT: P9A.9
REF: INA1.1 INA2.1 INA3.1 INA4.1 U8.1 U8.4 | length 2143.1
  Top Layer w15: v1(1471.98,-3754.18) 1484.91,-3741.25 INA1.1@1523.7,-3741.25 ; INA2.1@1824.54,-4031.75 1824.54,-4059.33 1834.03,-4068.82 v1(1839.2,-4068.82) ; 1826.27,-3448.17 1826.27,-3421.45 ; INA3.1 2162.61,-3746.65 v1@2170.2,-3739.06 ; U8.1@2135,-3230 U8.1@2137.76,-3230 ; U8.1@2145,-3230 2170,-3230 2185,-3245 2185,-3270 U8.4@2225,-3310
  Bottom Layer w15: v1(1471.98,-3754.18) 1471.98,-3792.94 1469.78,-3795.15 1521.84,-3847.21 1573.85,-3847.21 1595.01,-3826.05 1661.61,-3826.05 1740.76,-3905.2 1740.76,-4006.34 1803.41,-4068.99 1840.39,-4068.99 1846.08,-4074.68 1908.67,-4074.68 1942.8,-4040.55 1942.8,-4002.62 1907.29,-3967.11 1907.29,-3892.1 1964.4,-3835 2081.97,-3835 v1@2173.21,-3743.76 ; v1@1817.91,-3411.3 1854.21,-3411.3 1910.04,-3467.14 1909.02,-3467.14 1909.02,-3584.37 1986.6,-3661.95 2043.14,-3661.95 2075.87,-3629.22 2116.81,-3629.22 2173.33,-3685.74 2173.33,-3738.28 v1@2171.77,-3739.85
  other v1: 2172.79,-3741.25 1817.65,-3411.11
SYS_5V: P9A.7 P9A.8 | length 100
  Bottom Layer w15: P9A.8 P9A.7
SYS_RESETN: P9A.10
TIMER4: P8A.7 U2.8 U3.8 | length 1608.3
  Top Layer w15: U3.8 92,-1728 92,-1230 717,-605 785,-605 P8A.7
UART4_RXD: P9A.11 U4.1 | length 6006.7
  Top Layer w15: U4.1 205,-4232 245,-4272 938,-4272 1064,-4146 1076.72,-943.28 v1(1076.72,-835.28)
  Bottom Layer w15: v1(1076.72,-835.28) 1117.02,-794.98 2685,-794.98 2700,-779.98 2700,-750 P9A.11
UART4_TXD: P9A.13 U4.2 | length 5600
  Top Layer w15: U4.2 264.06,-4026.06 172,-3934 172,-3615 222,-3565 476,-3565 785,-3256 785,-2215 798,-2202 856,-2202 1051.43,-2006.57 v1(1051.43,-879)
  Bottom Layer w15: v1(1051.43,-879) 1067.43,-895 2695,-895 P9A.13
UART5_RXD: P8A.38 R3a.2 R4a.2 | length 152.6
  Top Layer w15: R4a.2 2268.62,-2976.38 R3a.2@2275,-2970
UART5_TXD: P8A.37 U6.3 | length 459.5
  Top Layer w15: 2325,-2925 2325,-3260 2377.4,-3312.4 U6.3
VDD_5V: D1.1 INA1.3 INA2.3 INA3.3 INA4.3 J10.1 P9A.5 P9A.6 U1.1 U6.5 U7.5 U8.5 US1.1 | length 516.5
  Top Layer w15: v1(1540.65,-3814.44) 1556.65,-3798.44 INA1.3 ; v1(1744.88,-3492.2) 1745.11,-3492.2 1747.83,-3494.92 INA4.3@1786.65,-3494.92 ; INA2.3 1894.32,-3993.35 v1(1914.33,-4013.37) ; INA3.3 v1@2088.35,-3672 ; D1.1 v1(3117.5,-449.51)
  Top Layer w20: v1@2087.66,-3672.18 2087.66,-3708.57 2089.54,-3710.46 INA3.3
  Top Layer w30: v2(2205,-3145) 2232.24,-3172.24 U8.5 ; v2(2495,-3145) 2522.24,-3172.24 U6.5
  other v1: 2091.59,-3665.35
VDD_ADC: P9A.32 R1d.1 | length 586.9
  Top Layer w15: 2225,-2165 P9A.32
pads on no net: J12.2 J13.2 P8A.8 P8A.9 P8A.10 P8A.31 P8A.32 P8A.33 P8A.34 P8A.35 P8A.36 P8B.2 P8B.4 P8B.6 P9A.17 P9A.18 P9A.21 P9A.29 P9A.30 P9A.31 P9A.35 P9A.36 P9B.1 U1.3 U2.13 U2.14 U2.15 U2.16 U2.17 U2.18 U4.3 U4.4 U4.5 U4.6 U4.7 U4.8 U4.9 U4.10 U4.11 U4.14 U4.15 U4.16 U4.17 U4.18 U4.19 U4.20 U4.21 U4.22 U4.23 U4.25 U4.27 U4.28 U4.29 U4.30 U4.31 U4.32 U4.33 U4.34 u5.1 U7.1

## Polygon pours and split planes (outlines as drawn)
VDD_5V on PowerPlane (split plane): 3634.91,-4289.91 10.09,-4289.91 10.09,-10.09 1479.91,-10.09 1479.91,-275 1480.26,-277.61 1481.27,-280.04 1482.87,-282.13 1484.96,-283.73 1487.39,-284.74 1490,-285.09 2190,-285.09 2192.61,-284.74 2195.04,-283.73 2197.13,-282.13 2198.73,-280.04 2199.74,-277.61 2200.09,-275 2200.09,-10.09 3634.91,-10.09
GND on GroundPlane (split plane): 3634.91,-4289.91 10.09,-4289.91 10.09,-10.09 1479.91,-10.09 1479.91,-275 1480.26,-277.61 1481.27,-280.04 1482.87,-282.13 1484.96,-283.73 1487.39,-284.74 1490,-285.09 2190,-285.09 2192.61,-284.74 2195.04,-283.73 2197.13,-282.13 2198.73,-280.04 2199.74,-277.61 2200.09,-275 2200.09,-10.09 3634.91,-10.09

## Silkscreen, mask and mechanical layers (free items; w line width, h text height)
Top Overlay:
  circle w10: c1820,-1880 r625
  lines w10: 590,-1880 1820,-1880 ; 950,-2750 1820,-1880 ; 950,-1010 1820,-1880 ; 2690,-2750 1820,-1880 ; 3050,-1880 1820,-1880 ; 0,-2535 255,-2280 255,-1495 0,-1240 1175,-65 1430,-320 2215,-320 2470,-65 3645,-1240 3390,-1495 3390,-2280 3645,-2535 2470,-3710 2215,-3455 1430,-3455 1175,-3710 0,-2535
  lines w15: 1310,-825 1310,-500 2220,-500 2220,-825 1310,-825
  text "QuadCape" at 1639,-617 h60
  text "Rev. 0.1" at 1640,-750 h60

## Text inside footprints (layer, text, board x,y; h text height)
U2: Mechanical 5 "*" at 2298,-4078 h30 r180
U3: Mechanical 5 "*" at 182,-1437 h30 r90
U7: Mechanical 5 "*" at 2725,-3250 h25